# Altium PCB PCB1.PcbDoc
Units mil, origin at the board's own origin, x right, y up, seen from the top; angles counter-clockwise.
Board outline 2539.37 x 1515.75 mil, 2 copper layers (Top Layer, Bottom Layer); 111 components, 58 nets, 334 pads, 219 vias.
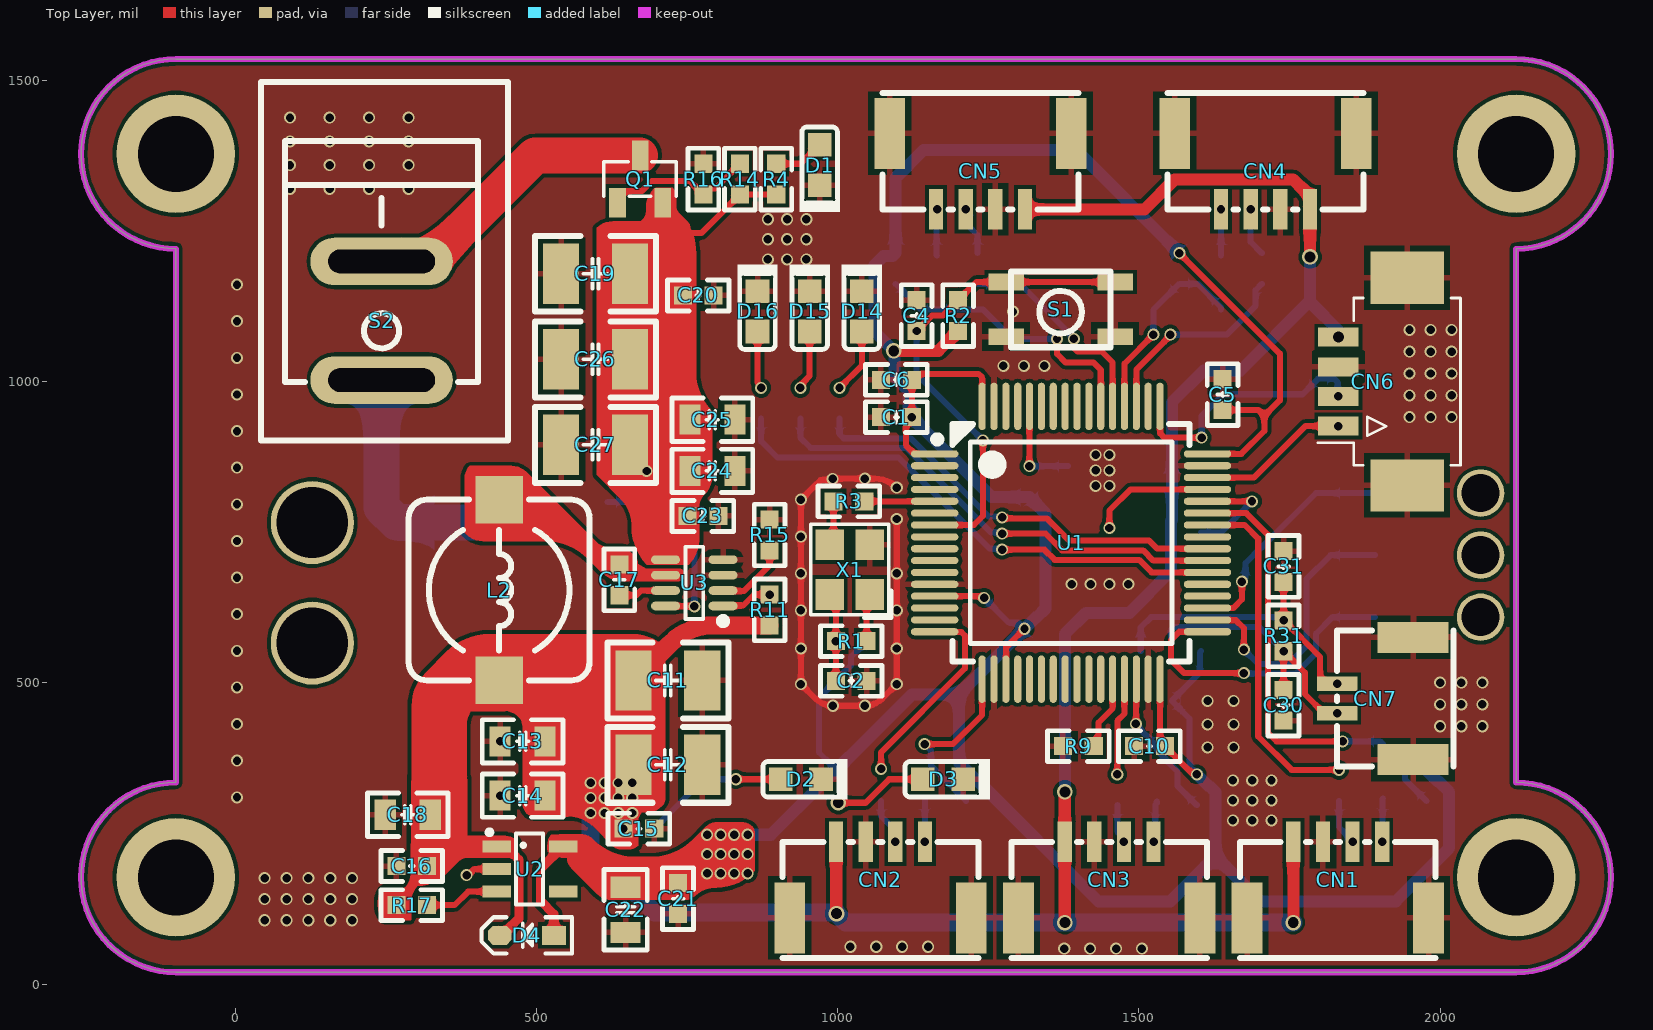
[diagram p0: Top Layer view]
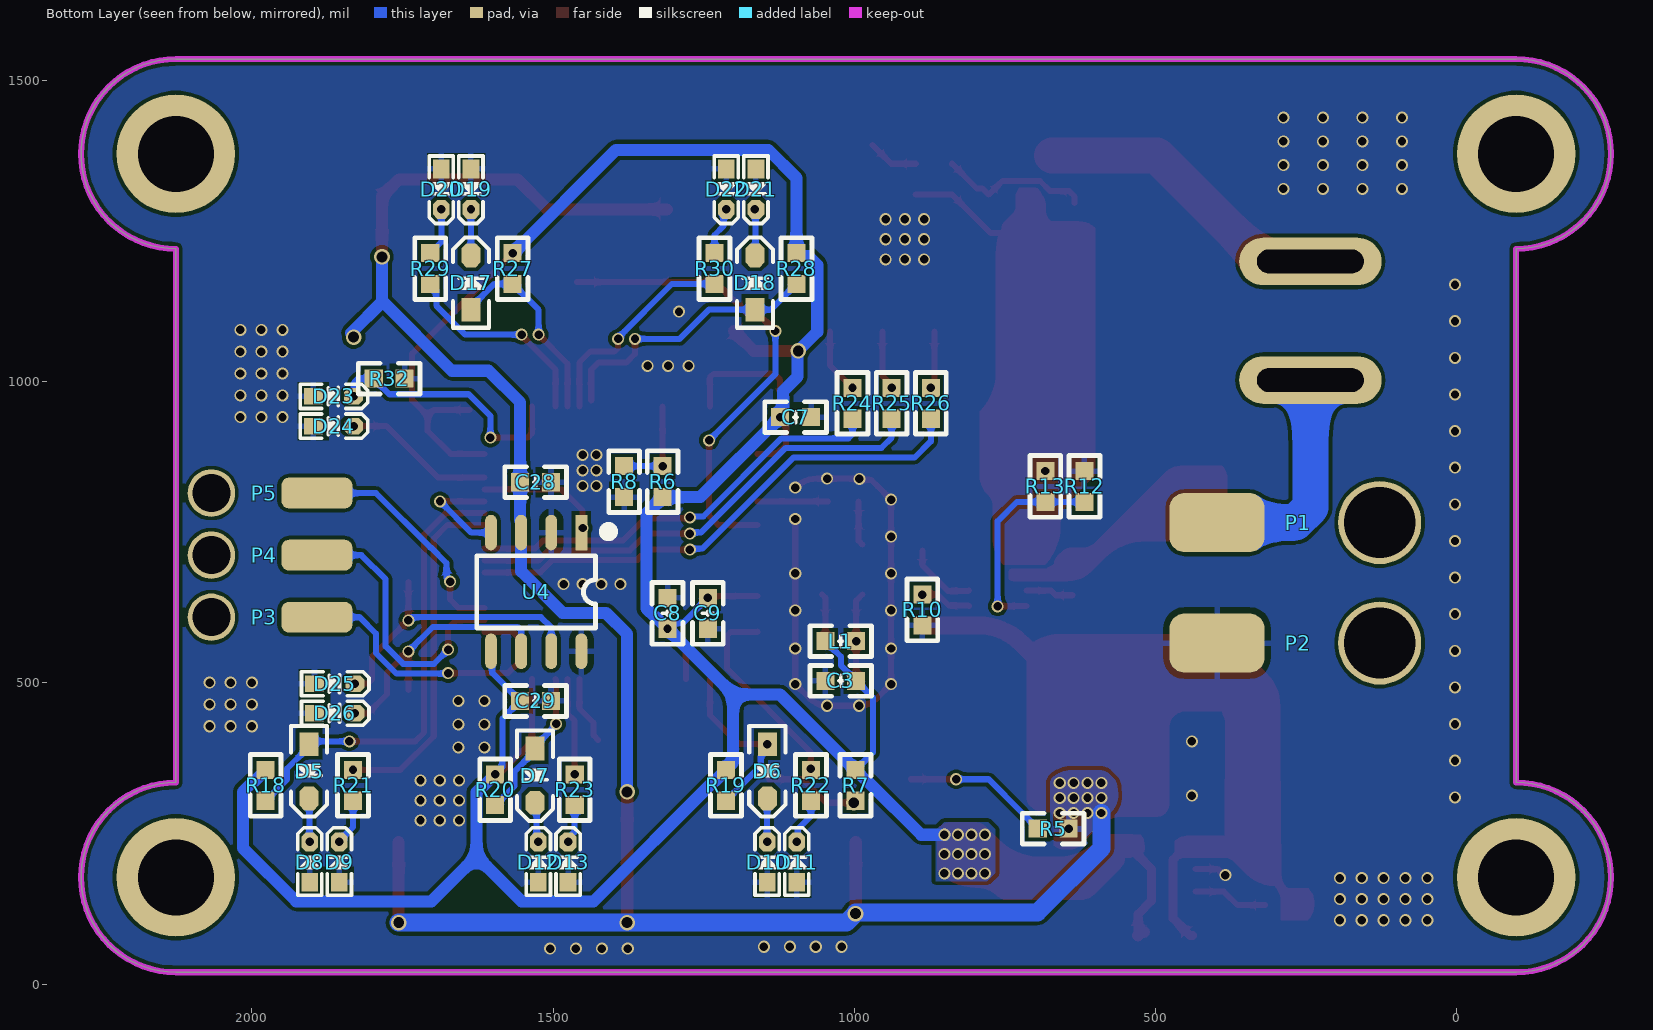
[diagram p1: Bottom Layer view, seen from below]
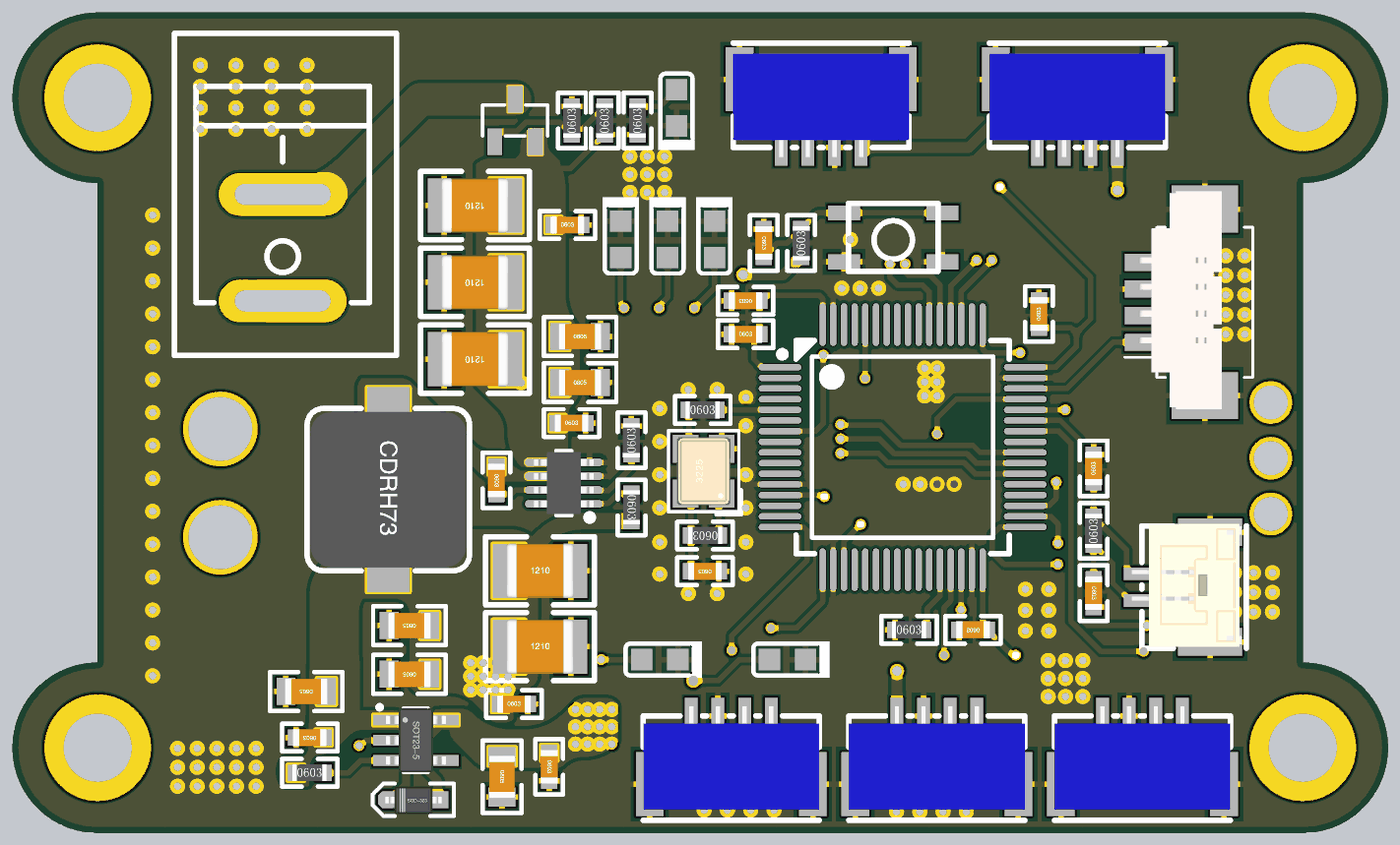
[diagram p2: 3D render of the assembled board from above, using the file's embedded part models]
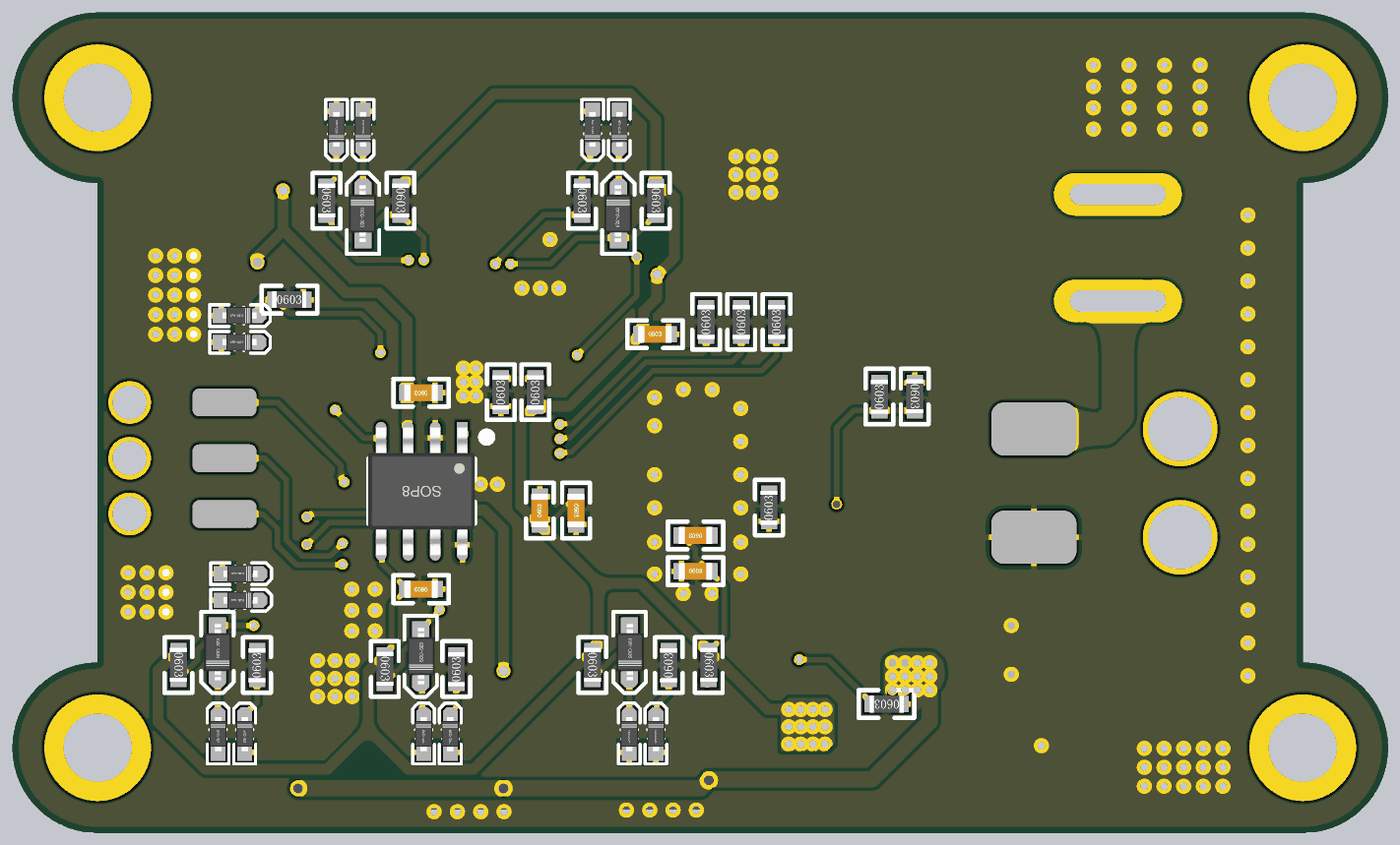
[diagram p3: 3D render of the assembled board from below, using the file's embedded part models]

## Layer stack, top to bottom
Top Solder: solder mask 0.4, Solder Resist, Dk 3.5
Top Layer: signal copper 1.4
Dielectric 1: dielectric 12.6, FR-4, Dk 4.8
Bottom Layer: signal copper 1.4
Bottom Solder: solder mask 0.4, Solder Resist, Dk 3.5

## Board outline
-98.43,334.65 -98.43,1220.47 cw(c-98.43,1377.95) -98.43,1535.43 2125.98,1535.43 cw(c2125.98,1377.95) 2125.98,1220.47 2125.98,334.65 cw(c2125.98,177.17) 2125.98,19.69 -98.43,19.68 cw(c-98.43,177.17)

## Design rules (kind name [scope] priority, off if disabled: settings)
Clearance [All] p1: gap=6 ignorepadtopadclearanceinfootprint=FALSE
PolygonConnect [All] p1: thpad.connectstyle=Relief thpad.reliefconductorwidth=10 thpad.reliefentries=4 thpad.polygonreliefangle="90 Angle" thpad.airgapwidth=10 smdpad.connectstyle=Relief smdpad.reliefconductorwidth=10 smdpad.reliefentries=4 smdpad.polygonreliefangle="90 Angle" smdpad.airgapwidth=10 via.connectstyle=Direct via.reliefconductorwidth=10 via.reliefentries=4 via.polygonreliefangle="90 Angle" via.airgapwidth=10
RoutingVias [All] p1: holewidth=14 width=50 viastyle="Through Hole" minholewidth=10 minwidth=10 maxholewidth=28 maxwidth=20
SolderMaskExpansion [All] p1: expansion=4 istentingtop=FALSE
Width [All] p1: maxlimit=60 minlimit=6 preferedwidth=10
30 further rules are at their usual default settings.

## Classes and differential pairs
component class Sheet1: C1 C2 C3 C4 C5 C6 C7 C8 C9 C10 C11 C12 C13 C14 C15 C16 C17 C18 C19 C20 C21 C22 C23 C24 C25 C26 C27 C28 C29 C30 C31 CN1 CN2 CN3 CN4 CN5 CN6 CN7 D1 D2 D3 D4 D5 D6 D7 D8 D9 D10 D11 D12 D13 D14 D15 D16 D17 D18 D19 D20 D21 D22 D23 D24 D25 D26 L1 L2 P1 P2 P3 P4 P5 Q1 R1 R2 R3 R4 R5 R6 R7 R8 R9 R10 R11 R12 R13 R15 R18 R21 R25 R26 R28 R31 R32 S1 S2 U1 U2 U3 U4 X1

## Components (designator, comment, footprint, x,y, rotation, side; value= is the part's Value field where it differs from the comment)
C1 "4.7uF" "C 0603_L" 1097.41,941 r0 top
C2 "100nF" "C 0603_L" 1022.46,503.34 r180 top
C3 "1uF" "C 0603_L" 1022.46,503.34 r180 bottom
C4 "100nF" "C 0603_L" 1131,1109.59 r270 top
C5 "4.7uF" "C 0603_L" 1639,978.59 r90 top
C6 "100nF" "C 0603_L" 1097.41,1003 r180 top
C7 "100nF" "C 0603_L" 1097.41,941 r180 bottom
C8 "100nF" "C 0603_L" 1310,615.41 r90 bottom
C9 "100nF" "C 0603_L" 1243,615.41 r270 bottom
C10 "100nF" "C 0603_L" 1517.41,395 r180 top
C11 "47uF/50V/1210" "C 1210_L" 718,504 r0 top
C12 "47uF/50V/1210" "C 1210_L" 718,364 r0 top
C13 "4.7uF/50V/0805" "C 0805_L" 477,402.84 r180 top
C14 "1uF/50V/0805" "C 0805_L" 477,312.84 r180 top
C15 "100nF/50V/0603" "C 0603_L" 670,258 r0 top
C16 "100nF/50V/0603" "C 0603_L" 293,196 r180 top
C17 "10nF/50V/0603" "C 0603_L" 637.6,671 r270 top
C18 "10uF/16V/0805" "C 0805_L" 286.4,281 r180 top
C19 "47uF/50V/1210" "C 1210_L" 598,1179 r180 top
C20 "100nF/50V/1210" "C 0603_L" 768.59,1143 r0 top
C21 "100nF/50V/0603" "C 0603_L" 735,142 r270 top
C22 "10uF/16V/0805" "C 0805_L" 648,123.4 r270 top
C23 "100nF/50V/0603" "C 0603_L" 776.26,777 r0 top
C24 "1uF/50V/0805" "C 0805_L" 792,851.84 r0 top
C25 "4.7uF/50V/0805" "C 0805_L" 792,936.84 r0 top
C26 "47uF/50V/1210" "C 1210_L" 598,1037 r180 top
C27 "47uF/50V/1210" "C 1210_L" 598,895 r180 top
C28 "0.1uF/0603" "C 0603_L" 1529,833 r0 bottom
C29 "0.1uF/0603" "C 0603_L" 1529,470 r0 bottom
C30 "47pF/0603" "C 0603_L" 1740.01,462.79 r270 top
C31 "47pF/0603" "C 0603_L" 1740,693.2 r90 top
CN1 "GH1.25" "GH1.25 4P-WT" 1830,173 r0 top
CN2 "GH1.25" "GH1.25 4P-WT" 1071,173 r0 top
CN3 "GH1.25" "GH1.25 4P-WT" 1450.5,173 r0 top
CN4 "GH1.25" "GH1.25 4P-WT" 1710,1349 r180 top
CN5 "GH1.25" "GH1.25 4P-WT" 1237,1349 r180 top
CN6 "MX1.25_4p" MX1.25_4PIN 1888,1000 r270 top
CN7 "GH1.25-2P" GH1.25-2P-LT 1892,474 r90 top
D1 "LED" LED_0603 970,1359.47 r90 top
D2 "LED" LED_0603 939,340 r180 top
D3 "LED" LED_0603 1174.8,340 r180 top
D4 "SD103AWS" SOD-323 484,81 r180 top
D5 "SD103AWS" SOD-323 1905,353.22 r270 bottom
D6 "SD103AWS" SOD-323 1144.41,353.22 r270 bottom
D7 "SD103AWS" SOD-323 1530,345.91 r270 bottom
D8 "ESD5Z5VL" SOD-523 1903.8,202.53 r90 bottom
D9 "ESD5Z5VL" SOD-523 1854.6,202.53 r90 bottom
D10 "ESD5Z5VL" SOD-523 1144.8,202.53 r90 bottom
D11 "ESD5Z5VL" SOD-523 1095.59,202.53 r90 bottom
D12 "ESD5Z5VL" SOD-523 1524.3,202.53 r90 bottom
D13 "ESD5Z5VL" SOD-523 1475.1,202.53 r90 bottom
D14 "LED" LED_0603 1040,1116.46 r270 top
D15 "LED" LED_0603 953.5,1116.46 r270 top
D16 "LED" LED_0603 867,1116.46 r270 top
D17 "SD103AWS" SOD-323 1636.2,1164.38 r90 bottom
D18 "SD103AWS" SOD-323 1164.91,1164.38 r90 bottom
D19 "ESD5Z5VL" SOD-523 1636.2,1319.47 r270 bottom
D20 "ESD5Z5VL" SOD-523 1685.4,1319.47 r270 bottom
D21 "ESD5Z5VL" SOD-523 1163.2,1319.47 r270 bottom
D22 "ESD5Z5VL" SOD-523 1212.41,1319.47 r270 bottom
D23 "ESD5Z5VL" SOD-523 1864.38,975.39 r180 bottom
D24 "ESD5Z5VL" SOD-523 1864.38,926.18 r180 bottom
D25 "ESD5Z5VL" SOD-523 1862.47,498.6 r180 bottom
D26 "ESD5Z5VL" SOD-523 1862.47,449.4 r180 bottom
L1 "磁珠470Ω" "C 0603_L" 1022.47,569.34 r0 bottom
L2 "33uF/1.5A" IND-SMD_L7.3-W7.3 438,654 r270 top
P1 "PAD_VCC" PAD_VCC 128,766 r90 bottom
P2 "PAD_VCC" PAD_VCC 128,566 r90 bottom
P3 "PAD_Signal" pad_signal 2067,609 r270 bottom
P4 "PAD_Signal" pad_signal 2067,712 r270 bottom
P5 "PAD_Signal" pad_signal 2067,815 r270 bottom
Q1 "YJL3401A" SOT-23-3_L2.9-W1.3-P1.90-LS2.4-BR 672,1336 r270 top
R1 "10K/0603" "R 0603_S" 1022.46,569.34 r180 top
R2 "1K" "R 0603_S" 1200,1109.59 r90 top
R3 "10Ω/0603" "R 0603_S" 1018.47,801.34 r0 top
R4 "40K/0603" "R 0603_S" 898,1336 r90 top
R5 "10K/0603" "R 0603_S" 670,257.99 r0 bottom
R6 "10K/0603" "R 0603_S" 1318,834 r90 bottom
R7 "10K/0603" "R 0603_S" 998,329.89 r270 bottom
R8 "10K/0603" "R 0603_S" 1382,834 r90 bottom
R9 "10K/0603" "R 0603_S" 1399.41,395 r0 top
R10 "30k/0603" "R 0603_S" 887,621.01 r90 bottom
R11 "220k/0603" "R 0603_S" 887,621 r270 top
R12 "30k/0603" "R 0603_S" 618,825.99 r270 bottom
R13 "100k/0603" "R 0603_S" 683,826 r90 bottom
R14 "40k/0603" "R 0603_S" 837.5,1336 r90 top
R15 "47k/0603" "R 0603_S" 886.99,745.41 r90 top
R16 "10k/0603" "R 0603_S" 777,1336 r90 top
R17 "4.7k/0603" "R 0603_S" 293.01,131 r0 top
R18 "10K/0603" "R 0603_S" 1977,329.89 r270 bottom
R19 "10K/0603" "R 0603_S" 1213,329.89 r270 bottom
R20 "10K/0603" "R 0603_S" 1596,322.59 r270 bottom
R21 "100Ω/0603" "R 0603_S" 1832,329.9 r90 bottom
R22 "100Ω/0603" "R 0603_S" 1072,329.9 r90 bottom
R23 "100Ω/0603" "R 0603_S" 1464,322.59 r90 bottom
R24 "10K/0603" "R 0603_S" 1003,964 r90 bottom
R25 "10K/0603" "R 0603_S" 938,964 r90 bottom
R26 "10K/0603" "R 0603_S" 873,964 r90 bottom
R27 "10K/0603" "R 0603_S" 1567,1187.69 r270 bottom
R28 "10K/0603" "R 0603_S" 1096,1187.69 r270 bottom
R29 "100Ω/0603" "R 0603_S" 1703.79,1187.69 r270 bottom
R30 "100Ω/0603" "R 0603_S" 1232,1187.69 r270 bottom
R31 "120Ω/0603" "R 0603_S" 1740,578 r90 top
R32 "10K/0603" "R 0603_S" 1772,1005 r180 bottom
S1 "C918859" KEY-4.2*3.25 1370,1120 r180 top
S2 "KCD1-101" SW-TH_MR5-111-C5N-BB 243,1101 r90 top
U1 "STM32F103RCT6" LQFP-64_L10.0-W10.0-P0.50-LS12.0-BL 1387.37,732.47 r270 top
U2 "LP5907QMFX-3.3Q1" SOT23-5N 489,191 r270 top
U3 "SY8303AIC" TSOT-23-8_L2.9-W1.6-P0.65-LS2.8-BR 762,666 r0 top
U4 "TJA1051T/3/1J" SOP8_L 1528,651 r270 bottom
X1 "YSO680PR_12M_3.3V" "OSC 3225-4P" 1020,688 r90 top

## Footprints (in the part's own frame and the unit in brackets; to place one, negate y for a bottom-side part, rotate by r counter-clockwise, add the part's x,y. Pads: shape width x height; smd on the part's side, far side on the other; paste and mask are expansions set on the pad)
"C 0603_L" [mil] "无极性贴片电容"
  rect 30x30 smd: 1(-25.59,0) 2(25.59,0)
  silkscreen extent -51,-26 51,26, body extent -31,-16 31,16, height 32
"C 0805_L" [mil] "无极性贴片电容"
  rect 35x50 smd: 1(-37.4,0) 2(37.4,0)
  silkscreen extent -67,-36 67,36, body extent -39,-24 39,24, height 20
"C 1210_L" [mil] "无极性贴片电容"
  rect 60x100 smd: 1(-57.09,0) 2(57.09,0)
  silkscreen extent -100,-63 100,63, body extent -63,-51 63,51, height 60
"GH1.25 4P-WT" [mil]
  rect 23.6x67 smd: 1(73.8,62.99) 2(24.6,62.99) 3(-24.6,62.99) 4(-73.81,62.99)
  rect 51.18x118.11 smd: 5(150.6,-62.99) 6(-150.6,-62.99)
  silkscreen extent -162,-130 162,63, body extent -162,-110 162,81, height 172
GH1.25-2P-LT [mil]
  rect 23.6x67 smd: 1(24.6,62.99) 2(-24.6,62.99)
  rect 51.18x118.11 smd: 3(101.38,-62.99) 4(-101.38,-62.99)
  silkscreen extent -113,-130 113,63, body extent -110,-121 116,81, height 162
IND-SMD_L7.3-W7.3 [mm] "7.3*7.3*3.4mm（长宽高）"
  rect 2x2 smd: 1(-3.81,0) 2(3.81,0)
  silkscreen extent -3.81,-3.81 3.81,3.81, body extent -3.65,-3.65 3.65,3.65, height 3.65
KEY-4.2*3.25 [mm]
  rect 1.5x0.7 smd: 1(2.299,-1.15) 2(-2.299,-1.15) 3(2.299,1.15) 4(-2.299,1.15)
  silkscreen extent -2.1,-1.6 2.1,1.6
LED_0603 [mm]
  rect 1x1 smd paste+0 mask+0: 1(0.85,0) 2(-0.85,0)
  silkscreen extent -1.97,-0.85 1.6,0.85, body extent -0.92,-0.53 1.09,0.53, height 0.46
LQFP-64_L10.0-W10.0-P0.50-LS12.0-BL [mm]
  oval 0.3x2 smd paste+0 mask+0.051: 1(-3.75,-5.75) 2(-3.25,-5.75) 3(-2.75,-5.75) 4(-2.25,-5.75) 5(-1.75,-5.75) 6(-1.25,-5.75) 7(-0.75,-5.75) 8(-0.25,-5.75) 9(0.25,-5.75) 10(0.75,-5.75) 11(1.25,-5.75) 12(1.75,-5.75) 13(2.25,-5.75) 14(2.75,-5.75) 15(3.25,-5.75) 16(3.75,-5.75) 33(3.75,5.75) 34(3.25,5.75) 35(2.75,5.75) 36(2.25,5.75) 37(1.75,5.75) 38(1.25,5.75) 39(0.75,5.75) 40(0.25,5.75) 41(-0.25,5.75) 42(-0.75,5.75) 43(-1.25,5.75) 44(-1.75,5.75) 45(-2.25,5.75) 46(-2.75,5.75) 47(-3.25,5.75) 48(-3.75,5.75)
  oval 2x0.3 smd paste+0 mask+0.051: 17(5.75,-3.75) 18(5.75,-3.25) 19(5.75,-2.75) 20(5.75,-2.25) 21(5.75,-1.75) 22(5.75,-1.25) 23(5.75,-0.75) 24(5.75,-0.25) 25(5.75,0.25) 26(5.75,0.75) 27(5.75,1.25) 28(5.75,1.75) 29(5.75,2.25) 30(5.75,2.75) 31(5.75,3.25) 32(5.75,3.75) 49(-5.75,3.75) 50(-5.75,3.25) 51(-5.75,2.75) 52(-5.75,2.25) 53(-5.75,1.75) 54(-5.75,1.25) 55(-5.75,0.75) 56(-5.75,0.25) 57(-5.75,-0.25) 58(-5.75,-0.75) 59(-5.75,-1.25) 60(-5.75,-1.75) 61(-5.75,-2.25) 62(-5.75,-2.75) 63(-5.75,-3.25) 64(-5.75,-3.75)
  silkscreen extent -5,-5.79 5,5
MX1.25_4PIN [mm]
  rect 0.8x1.7 smd: 1(1.875,-1.45) 2(0.625,-1.45) 3(-0.625,-1.45) 4(-1.875,-1.45)
  rect 2.2x3.1 smd: 5(-4.375,1.45) 6(4.375,1.45)
  silkscreen extent -3.52,-2.3 3.53,3.7, body extent -5.21,-1.65 5.01,2.25, height 4.75
"OSC 3225-4P" [mm] "3.2*2.5*0.7mm(长宽高)"
  rect 1.3x1.2 smd: 1(-1.05,-0.85) 2(1.05,-0.85) 3(1.05,0.85) 4(-1.05,0.85)
  silkscreen extent -2.03,-1.75 1.91,1.65, body extent -1.6,-1.25 1.6,1.25, height 0.7
pad_signal [mm]
  rrect50% 1.3x3 smd: 1(0,4.445)
  round 2 hole 1.6: 2(0,0)
PAD_VCC [mm]
  rrect50% 2.5x4 smd: 1(0,6.858)
  round 3.5 hole 3: 2(0,0)
"R 0603_S" [mil] "贴片电阻"
  rect 30x30 smd: 1(-25.59,0) 2(25.59,0)
  silkscreen extent -51,-26 51,26, body extent -32,-16 31,16, height 18
SOD-323 [mm] "1.8x1.3X0.9mm（长宽高，不包括引脚）"
  rect 1x0.8 smd: 1(-1.143,0)
  oct 1x0.8 smd: 2(1.143,0)
  silkscreen extent -1.91,-0.76 1.91,0.76, body extent -1.34,-0.63 1.31,0.67, height 1
SOD-523 [mm] "1.2x0.8X0.6mm（长宽高，不包括引脚）"
  rect 0.8x0.7 smd: 1(-0.85,0)
  oct 0.8x0.7 smd: 2(0.85,0)
  silkscreen extent -1.4,-0.51 1.45,0.51, body extent -0.8,-0.4 0.8,0.4, height 0.65
SOP8_L [mm] "5*6*1.8mm（长宽高）"
  rect 1.5x0.5 smd: 1(-2.5,1.905)
  oval 1.5x0.5 smd: 2(-2.5,0.635) 3(-2.5,-0.635) 4(-2.5,-1.905) 5(2.5,-1.905) 6(2.5,-0.635) 7(2.5,0.635) 8(2.5,1.905)
  silkscreen extent -2.69,-2.5 1.52,3.2, body extent -3,-2.5 3,2.5, height 1.9
SOT23-5N [mm] "3x1.6x1.1mm(长宽高)"
  rect 0.5x1.2 smd: 1(-0.95,-1.4) 2(0,-1.4) 3(0.95,-1.4) 4(0.95,1.4) 5(-0.95,1.4)
  silkscreen extent -1.63,-1.78 1.5,0.56, body extent -1.5,-1.4 1.5,1.4, height 1.15
SOT-23-3_L2.9-W1.3-P1.90-LS2.4-BR [mm]
  rect 1.25x0.7 smd mask+0.051: 1(1,-0.95) 2(1,0.95) 3(-1,0)
  silkscreen extent -0.73,-1.53 0.73,1.53
SW-TH_MR5-111-C5N-BB [mm]
  oval 2x6 hole 1 slot 4.5 at 90 deg paste+0 mask+0.051: 1(-2.5,0) 2(2.5,0)
  silkscreen extent -5.06,-5.33 10.06,5.08
TSOT-23-8_L2.9-W1.6-P0.65-LS2.8-BR [mil]
  oval 48.1x14.3 smd mask+2: 1(47.7,-38.4) 2(47.7,-12.8) 3(47.7,12.8) 4(47.7,38.4) 5(-47.7,38.4) 6(-47.7,12.8) 7(-47.7,-12.8) 8(-47.7,-38.4)
  silkscreen extent -15,-69 54,60, body extent -55,-57 55,57, height 39

## Part data
C1 C2 C3 C4 C5 C6 C7 C8 C9 C10 C11 C12 C13 C14 C15 C17 C18 C19 C20 C22 C23 C24 C25 C26 C27 C28 C29 C30 C31: library part CAP, "陶瓷电容"
C16 C21: library part CAP, "Capacitor"
CN1 CN2 CN3 CN4 CN5: library part "GH1.25 4p", "连接端子", BOM_Manufacturer="Changjiang Connectors", BOM_Manufacturer Part=A1257WR-S-4P, BOM_Supplier=LCSC, BOM_Supplier Part=C225127, Contributor=LCSC, spicePre=C, spiceSymbolName=A1257WR-S-4P
CN6: "连接端子", BOM_Manufacturer="Changjiang Connectors", BOM_Manufacturer Part=A1257WR-S-4P, BOM_Supplier=LCSC, BOM_Supplier Part=C225127, Contributor=LCSC, spicePre=C, spiceSymbolName=A1257WR-S-4P
CN7: "连接端子", BOM_Manufacturer="Changjiang Connectors", BOM_Manufacturer Part=A1257WR-S-2P, BOM_Supplier=LCSC, BOM_Supplier Part=C225125, Contributor=LCSC, spicePre=C, spiceSymbolName=A1257WR-S-2P
D1 D2 D3 D14 D15 D16: "发光二极管"
D4 D5 D6 D7 D17 D18: "二极管"
D8 D9 D10 D11 D12 D13 D19 D20 D21 D22 D23 D24 D25 D26: "ESD 单向 5V", BOM_JLCPCB Part Class="Extended Part", BOM_Manufacturer=MDD, BOM_Manufacturer Part=SMF6.5A, BOM_Supplier=LCSC, BOM_Supplier Part=C123792, Contributor=LCSC, spicePre=D, spiceSymbolName=SMF6.5A
L1: BOM_Manufacturer=Sunlord, BOM_Manufacturer Part=UPZ1608U471-1R5TF, BOM_Supplier=LCSC, BOM_Supplier Part=C74335, nameAlias=Value, spicePre=L, spiceSymbolName=UPZ1608U471-1R5TF
L2: library part L-SMD, "贴片功率电感", BOM名称=功率电感
Q1: Continuous Drain Current (Id)=4.4A, Drain Source On Resistance (RDS(on)@Vgs,Id)=55mΩ@10V,4.4A, Drain Source Voltage (Vdss)=30V, Gate Threshold Voltage (Vgs(th)@Id)=1.4V@250μA, JLCPCB Part Class="Extended Part", LCSC Part Name="P沟道 30V 4.4A", Manufacturer=YANGJIE(扬杰), Power Dissipation (Pd)=1.2W, Add into BOM=yes, Convert to PCB=yes, Datasheet=https://atta.szlcsc.com/upload/public/pdf/source/20190516/C393520_7481F6972A00CA4C56A9B9A98BC8DB32.pdf, Device=YJL3401A, Manufacturer Part=YJL3401A, Name=YJL3401A, Supplier=LCSC, Supplier Footprint=SOT-23, Supplier Part=C393520, Symbol=YJL3401A, Type=P沟道
R1 R2 R3 R4 R5 R6 R7 R8 R9 R10 R11 R12 R13 R14 R15 R16 R17 R18 R19 R20 R21 R22 R23 R24 R25 R26 R27 R28 R29 R30 R31 R32: library part RES, "贴片电阻"
S1: library part 按键, "DJI御用小按键"
S2: "单刀单掷 直插立式", BOM名称=1路单刀船型开关
U1: JLCPCB Part Class="Extended Part", LCSC Part Name="ARM Cortex-M3 72MHz", Low-Voltage Detect=-, Manufacturer=ST(意法半导体), Operating Temperature Range=-40℃~+85℃, Operating Voltage Range=2V~3.6V, ADC (Bit)=12bit, Add into BOM=yes, CCP Capture/Compare=-, communication protocol=-, Convert to PCB=yes, CPU Core="ARM Cortex-M3", CPU Maximum Speed=72MHz, DAC (Bit)=12bit, Datasheet=https://atta.szlcsc.com/upload/public/pdf/source/20161130/1480498797345.pdf, Device=STM32F103RCT6, Direct Memory Access=-, EEPROM=256KB, GPIO Ports Number=51, Infrared Data Association=-, Internal Comparator=-, Internal Oscillator=有, Manufacturer Part=STM32F103RCT6, Name=STM32F103RCT6, Peripheral/Function=DMA；看门狗；片载温度传感器；PWM, Program Memory Type=FLASH, Program Storage Size=256KB, PWM (Bit)=-, RAM Size=48KB, Real-Time Clock=-, Secure Digital Input and Output=-, Supplier=LCSC, Supplier Footprint=LQFP-64(10x10), Supplier Part=C8323, Symbol=STM32F103RCT6, Universal Serial Bus=-, Watchdog=-
U2: BOM_JLCPCB SMD=Yes, BOM_Manufacturer=TI, BOM_Manufacturer Part=LP5907QMFX-3.3Q1, BOM_Supplier=LCSC, BOM_Supplier Part=C130005, Contributor=LCSC, SMT Type=Extend, spicePre=U, spiceSymbolName=LP5907QMFX-3.3Q1
U3: "DCDC ADJ 3A", Input Voltage=-, JLCPCB Part Class="Extended Part", LCSC Part Name=降压型, Manufacturer=矽力杰silergy, Add into BOM=yes, Convert to PCB=yes, Datasheet=https://atta.szlcsc.com/upload/public/pdf/source/20170308/1488958431714.pdf, Device=SY8303AIC, Function=降压型, Manufacturer Part=SY8303AIC, Name=SY8303AIC, Number of Outputs=-, Output Current (Max)=-, Supplier=LCSC, Supplier Footprint=TSOT-23-8, Supplier Part=C97054, Switching Frequency=-, Symbol=SY8303AIC, Synchronous Rectification=-, Topology=-
U4: "CAN芯片", BOM_JLCPCB Part Class="Extended Part", BOM_Manufacturer=NXP, BOM_Manufacturer Part=TJA1051T/3/1J, BOM_Supplier=LCSC, BOM_Supplier Part=C38695, spicePre=U, spiceSymbolName=TJA1051T/3/1J
X1: "有源晶振12M", BOM_Manufacturer="Yangxing Tech", BOM_Manufacturer Part=OP322512MEDA4SI-u, BOM_Supplier=LCSC, BOM_Supplier Part=C382483, Contributor=LCSC, nameAlias=Frequency, spicePre=X, spiceSymbolName=OP322512MEDA4SI-U

## Free pads (board coordinates)
  round 196.85 hole 125.98: 8(-98.43,177.17) 8(-98.43,1377.95) 8(2125.98,177.17) 8(2125.98,1377.95)

## Via types
v1: diameter 20, hole 14, Top Layer to Bottom Layer, 211 vias
v2: diameter 26, hole 18, Top Layer to Bottom Layer, 8 vias

## Nets (pads, with @x,y where several pads share a name; then routed paths per layer and width w, separated by ;. In a path a pad name is that pad's centre, name@x,y a point inside that pad or via, vN(x,y) a via of type N, cw(c..) or ccw(c..) an arc to the next point about the centre after c; other vN are vias at no path point)
3V3: C1.2 C3.2 C5.1 C6.1 C7.1 C8.1 C9.1 C10.1 C21.1 C22.1 C29.2 D4.1 L1.2 R2.1 R6.1 R7.1 R18.1 R19.1 R20.1 R27.1 R28.1 U1.1 U1.13 U1.19 U1.32 U1.48 U1.64 U2.5 U4.5 | length 5686.1
  Top Layer w10: U1.13 1240.11,643.89 v1(1243,641) ; U1.1 1127.41,880.11 1113,894.53 1113,931 v1(1123,941) C6.1 1133,1013 1233.73,1013 1239.73,1007 U1.64 ; U1.19 1279.45,506.45 1279.45,559.27 v1(1310,589.82) ; U1.32 1535.01,402.99 C10.1 1587.9,350.1 1594.09,350.1 v1(1596,348.19) ; v1(1567,1213.29) 1734,1046.29 1734,969 1708,943 ; U1.48 1670.11,880.11 1708,918 1708,943 ; C5.1 1698,953 1708,943
  Top Layer w15: U2.5@528,226.06 530.34,228.4 U2.5 507,191.28 507,138.16 529,116.16 D4.1
  Top Layer w20: D4.1@519.31,86.75 523.25,86.75 D4.1 ; v2(1093,1051) 1167,1051 R2.1
  Bottom Layer w10: R7.1@993,360.49 969,384.49 969,475.46 C3.2 1022.47,528.93 1022.47,543.75 L1.2 ; v1(1243,641) 1284.18,599.82 1300,599.82 v1(1310,589.82) ; v1(1596,348.19) 1586,358.18 1583.75,360.44 1583.75,440.84 C29.2 1601.15,516.56 1601.15,550.72 U4.5
  Bottom Layer w20: v1(850.5,247.88) 888.95,247.88 976.37,335.31 977.82,335.31 R7.1 1123.33,480.82 1201,480.82 ; v1(1567,1213.29) 1395.6,1384.69 1142.8,1384.69 1096,1337.89 R28.1 1091,1208.29 1076.01,1208.29 1061.5,1193.78 1061.5,1082.5 v2(1093,1051) 1094.15,1049.85 1094.15,1008.23 1118,984.38 1118,946 v1(1123,941) 1255.59,808.41 R6.1 1345,781.4 1345,623.37 1330.59,608.96 1329.14,608.96 v1(1310,589.82) 1201,480.82 ; v1(1596,348.19) 1615.15,329.05 1616.59,329.05 1627,318.63 1627,235 1627,212 ; R18.1 1996.15,336.34 1997.59,336.34 2014.8,319.14 2014.8,225.8 1926.31,137.31 1701.69,137.31 1627,212 ; 1201,480.82 1201,367.49 R19.1 1232.15,336.34 1233.59,336.34 1432.62,137.31 1552.31,137.31 1627,212
  other v1: 783.45,183.88 805.8,183.88 828.15,183.88 850.5,183.88 783.45,215.88 805.8,215.88 828.15,215.88 850.5,215.88 783.45,247.88 805.8,247.88 828.15,247.88
5V: C11.1 C12.1 C13.1 C14.1 C15.1 C16.1 C18.1 C28.2 CN1.4 CN2.4 CN3.4 CN4.4 CN5.4 CN6.4 D4.2 L2.2 R5.1 R11.2 R17.1 U2.1 U4.3 | length 4014.2
  Top Layer w15: U2.1 447.66,228.4 460.61,215.45 461.99,215.45 471,206.43 471,109.07 442.94,81 D4.2
  Top Layer w20: C14.1@511.64,306.16 ccw(c504.94,312.84) C14.1 ; CN2.4 997.6,235.59 997.6,117.4 v2(998,117) ; CN5.4 1509.56,1286.01 1559.06,1335.51 1756.01,1335.51 1783.81,1307.71 CN4.4 1783.9,1285.91 1783.9,1207.1 v2(1784,1207) ; v2(1377,102) 1376.85,102.15 1376.85,318.85 v2(1377,319) ; v2(1756.1,102) v2(1756.1,102) 1756.15,235.94 CN1.4
  Top Layer w30: C11.1 723.04,566.12 cw(c793.75,495.41) 793.75,595.41 R11.2
  Bottom Layer w20: v2(1377,319) 1377,581 1412,616 1484,616 1553,685 U4.3 1553,768.8 1554.59,770.38 C28.2 1554.59,965.59 1607,1018 1668,1018 1784,1134 ; v2(1784,1207) 1784,1134 ; v2@1835,1081 1784,1132 1784,1134
  Bottom Layer w30: v1(590,284) 590,225.41 696.41,119 v2@998,119 ; v2(998,117) 1013,102 v2(1377,102) v2(1756.1,102)
  other v1: 644.41,258 613,284 636,284 659,284 590,309 613,309 636,309 659,309 590,334 613,334 636,334 659,334
  other v2: 1830.91,1073.82
24V: C19.1 C20.1 C23.1 C24.1 C25.1 C26.1 C27.1 Q1.2 R4.1 R13.2 R14.1 U3.5 | length 196.3
  Top Layer w10: 728,1247 774.1,1247 R14.1 R4.1
  other v1: 683,851.59
24V_IN: P1.1 S2.1 | length 376.9
  Bottom Layer w60: S2.1 243,791.04 268.04,766 P1.1
BOOT0: R6.2 R8.2 U1.60 | length 163.4
  Top Layer w10: v1(1318,859.59) 1318.23,859.82 1318.23,958.6 U1.60
  Bottom Layer w10: v1(1318,859.59) R8.2
BOOT1: R9.2 U1.28 | length 114.1
  Top Layer w10: R9.2@1425,405 1432.86,412.86 1432.86,434 1456.27,457.41 U1.28
CAN_H: C31.1 CN7.1 D25.2 R31.2 U4.7 | length 504.4
  Top Layer w10: C31.1 v1(1740,603.59) 1800.51,543.08 1800.51,505.4 1807.31,498.6 v1(1829.01,498.6)
  Bottom Layer w10: U4.7 1503,592 1520.1,609.1 1734.49,609.1 v1(1740,603.59)
CAN_L: C30.1 CN7.2 D26.2 R31.1 U4.6 | length 457.6
  Top Layer w10: C30.1 v1(1740,552.41) 1743.01,549.4 1775.26,517.15 1775.26,481.45 1807.31,449.4 v1(1829.01,449.4)
  Bottom Layer w10: U4.6 1553,587.24 1558.86,593.1 1699.31,593.1 v1(1740,552.41)
CAN_RX: U1.44 U4.4 | length 180
  Top Layer w10: U1.44 v1(1687.63,801.37)
  Bottom Layer w10: U4.4 1635.69,749.43 v1(1687.63,801.37)
CAN_TX: U1.45 U4.1 | length 206.3
  Top Layer w10: v1(1451,757) 1451,786 1486.05,821.05 U1.45
GND: C1.1 C2.1 C3.1 C4.1 C5.2 C6.2 C7.2 C8.2 C9.2 C10.2 C11.2 C12.2 C13.2 C14.2 C15.2 C16.2 C18.2 C19.2 C20.2 C21.2 C22.2 C23.2 C24.2 C25.2 C26.2 C27.2 C28.1 C29.1 C30.2 C31.2 CN1.3 CN1.5 CN1.6 CN2.3 CN2.5 CN2.6 CN3.3 CN3.5 CN3.6 CN4.3 CN4.5 CN4.6 CN5.3 CN5.5 CN5.6 CN6.3 CN6.5 CN6.6 CN7.3 CN7.4 D1.2 D2.2 D3.2 D8.1 D9.1 D10.1 D11.1 D12.1 D13.1 D14.2 D15.2 D16.2 D19.1 D20.1 D21.1 D22.1 D23.1 D24.1 D25.1 D26.1 P2.1 R8.1 R9.1 R10.1 R12.1 R15.2 R16.2 R32.2 S1.3 S1.4 U1.12 U1.18 U1.31 U1.47 U1.63 U2.2 U3.3 U3.4 U4.2 U4.8 X1.2 | length 996.3
  Top Layer w10: v1(384,181) 387.25,181 397.25,191 U2.2 ; v1(991.65,838.65) 989.74,836.74 971.74,836.74 961.27,826.27 v1(939,804) v1(939,742.8) v1(939,681.6) v1(939,620.4) v1(939,557) v1(939,498) 962.98,474.02 ccw(c992,503.04) v1(992,462) v1(1045,462) ccw(c1045,503.04) 1074.02,474.02 v1(1098,498) v1(1098,557) v1(1098,620.4) v1(1098,681.6) v1(1098,772) ; v1@992,839 v1(1045,839) 1061.79,839 cw(c1061.79,787.79) v1(1098,824)
  other v1: 1376,59 1419,59 1462,59 1505,59 1021,62 1064,62 1107,62 1150,62 49,106 85.25,106 121.5,106 157.75,106 194,106 49,141 85.25,141 121.5,141 157.75,141 194,141 49,176 85.25,176 121.5,176 157.75,176 194,176 1656,271.75 1688,271.75 1720,271.75 1656,305 1688,305 1720,305 3,310 439.6,312.84 1656,338.25 1688,338.25 1720,338.25 3,370.79 1614,393 1657,393 439.6,402.84 2000,428 2035,428 2070,428 1614,431 1657,431 3,431.57 2000,464.25 2035,464.25 2070,464.25 1614,470 1657,470 3,492.36 2000,500.5 2035,500.5 2070,500.5 3,553.14 3,613.93 1388.33,664 1419.67,664 1451,664 1482.33,664 3,674.71 3,735.5 3,796.29 1428,827 1451,827 1428,852.75 1451,852.75 3,857.07 1428,878.5 1451,878.5 3,917.86 1949,941 1984,941 2019,941 1949,977.25 1984,977.25 2019,977.25 3,978.64 1949,1013.5 1984,1013.5 2019,1013.5 1275,1026 1309,1026 1343,1026 3,1039.43 1949,1049.75 1984,1049.75 2019,1049.75 1949,1086 1984,1086 2019,1086 3,1100.21 1291,1116 3,1161 884,1203 916,1203 948,1203 884,1236.25 916,1236.25 948,1236.25 884,1269.5 916,1269.5 948,1269.5 91,1320 156.67,1320 222.33,1320 288,1320 91,1359.33 156.67,1359.33 222.33,1359.33 288,1359.33 91,1398.67 156.67,1398.67 222.33,1398.67 288,1398.67 91,1438 156.67,1438 222.33,1438 288,1438
GPIO_PB12: P3.1 U1.33 | length 505.5
  Top Layer w10: U1.33 1567,584.83 1553,570.83 1553,538 1575,516 v1(1674,516)
  Bottom Layer w10: v1(1674,516) 1674.59,515.41 1759.82,515.41 1794,549.59 1794,582 1821,609 P3.1
GPIO_PB13: P4.1 U1.34 | length 469.6
  Top Layer w10: U1.34 1614.09,604.17 1660.83,604.17 1674,591 v1(1674,555)
  Bottom Layer w10: v1(1674,555) 1697.59,531.41 1748.7,531.41 1778,560.7 1778,672 1818,712 P4.1
GPIO_PB14: P5.1 U1.35 | length 389.3
  Top Layer w10: U1.35 1614.09,624.55 1657.14,624.55 1670.94,638.34 v1(1670.94,667.94) v1@1674,671
  Bottom Layer w10: v1@1674,671 1677,674 1677,699 1703,725 1703.86,725 1793.86,815 P5.1
LED_PC7: R26.1 U1.38 | length 868.3
  Top Layer w10: v1(1273,721) 1343,721 1360,704 1500.27,704 1521.01,683.26 U1.38
  Bottom Layer w10: R26.1 873,901 900,874 1022.15,874 1022.45,873.7 1101.3,873.7 1252.09,722.91 1271.09,722.91 v1(1273,721)
LED_PC8: R25.1 U1.39 | length 791.8
  Top Layer w10: v1(1273,747.77) 1344.9,747.77 1372.66,720 1506.9,720 1523.96,702.94 U1.39
  Bottom Layer w10: R25.1 938,906.86 954.85,890 1028.78,890 1029.07,889.7 1114.3,889.7 1254.32,749.68 1271.09,749.68 v1(1273,747.77)
LED_PC9: R24.1 U1.40 | length 716.7
  Top Layer w10: v1(1273,774.53) 1274.53,773 1347,773 1384,736 1517,736 1530.37,722.63 U1.40
  Bottom Layer w10: R24.1 1003,912.82 1009.81,906 1035.4,906 1035.7,905.7 1120.92,905.7 1250.35,776.28 1257.35,776.28 1257.57,776.06 1270.94,776.06 v1@1274,773
NetC2_2: C2.2 L1.1 R1.2 X1.4 | length 147.6
  Top Layer w10: X1.4 996.88,636.32 v1(996.88,569.34) C2.2
NetC17_1: C17.1 L2.1 U3.6
NetC17_2: C17.2 U3.7 | length 79.9
  Top Layer w10: C17.2 665.41,645.41 673.2,653.2 U3.7
NetCN1_1: CN1.1 D5.2 D8.2 | length 72.7
  Bottom Layer w10: v1(1903.8,235.99) 1904.4,236.59 1904.4,307.61 D5.2
NetCN1_2: CN1.2 D9.2 R21.1 | length 77.7
  Bottom Layer w10: R21.1 1831.99,260.56 1854.6,237.96 v1(1854.6,235.99)
NetCN2_1: CN2.1 D6.2 D10.2 | length 72.4
  Bottom Layer w10: D6.2 1144.6,308.02 1144.6,236.18 v1(1144.8,235.99)
NetCN2_2: CN2.2 D11.2 R22.1 | length 78.1
  Bottom Layer w10: R22.1 1072,278.72 1093.68,257.04 1093.68,237.9 v1(1095.59,235.99)
NetCN3_1: CN3.1 D7.2 D12.2 | length 68.8
  Bottom Layer w10: v1(1524.3,235.99) 1527.15,238.84 1527.15,298.06 D7.2 ; D7.2@1528.95,301.95 D7.2@1530,303
NetCN3_2: CN3.2 D13.2 R23.1 | length 65.6
  Bottom Layer w10: R23.1 1464,253.01 1475.1,241.92 v1(1475.1,235.99)
NetCN4_1: CN4.1 D17.2 D19.2 | length 76.6
  Bottom Layer w10: D17.2 v1(1636.2,1286.01)
NetCN4_2: CN4.2 D20.2 R29.1 | length 80.3
  Bottom Layer w10: v1(1685.4,1286.01) 1685.4,1231.68 R29.1
NetCN5_1: CN5.1 D18.2 D21.2 | length 77.3
  Bottom Layer w10: D18.2 1164.06,1210.23 1164.06,1285.16 v1(1164.91,1286.01)
NetCN5_2: CN5.2 D22.2 R30.1 | length 80.8
  Bottom Layer w10: v1(1212.41,1286.01) 1217.22,1281.19 1217.22,1258.07 1232,1243.29 R30.1
NetD1_1: D1.1 R4.2 | length 85
  Top Layer w10: R4.2 938.66,1361.59 D1.1
NetD2_1: D2.1 R5.2 | length 244.3
  Top Layer w10: v1(831,340) D2.1
  Bottom Layer w10: R5.2 721,283.41 721,284 777,340 v1(831,340)
NetD3_1: D3.1 R7.2 | length 156.5
  Top Layer w10: v2(1001,301) 1046.49,301 1085.49,340 D3.1
NetD14_1: D14.1 R24.2 | length 108.7
  Top Layer w10: v1(1003,989.59) 1040,1026.59 D14.1
NetD15_1: D15.1 R25.2 | length 99.8
  Top Layer w10: v1(938,989.59) 938,993.92 953.5,1009.42 D15.1
NetD16_1: D16.1 R26.2 | length 95.9
  Top Layer w10: D16.1 867,998.29 873,992.29 v1(873,989.59)
NetQ1_1: Q1.1 R14.2 R16.1 | length 254.9
  Top Layer w10: Q1.1 634.6,1307.46 643.38,1316.24 675.06,1316.24 691.83,1333 754.41,1333 R16.1 787,1320.41 796.32,1320.41 R14.2
NetQ1_3: Q1.3 S2.2 | length 501.9
  Top Layer w60: S2.2 321.74,1199.42 497.69,1375.37 Q1.3
NetR1_1: R1.1 X1.1 | length 79.6
  Top Layer w10: R1.1 1048.06,641.26 X1.1
NetR3_1: R3.1 X1.3 | length 74.6
  Top Layer w10: X1.3 992.88,735.68 R3.1
NetR10_2: R10.2 R11.1 U3.1 | length 85.2
  Top Layer w10: U3.1 810.52,628.42 843.05,628.42 861.22,646.59 v1(887,646.59)
NetR12_2: R12.2 R13.1 U3.8 | length 346.6
  Top Layer w10: U3.8 714.6,627.3 761.7,627.3 v1(762,627)
  Bottom Layer w10: R12.2 R13.1 730,800.41 762,768.41 v1(762,627)
NetR15_1: R15.1 U3.2 | length 120.1
  Top Layer w10: U3.2 810.52,652.38 844.38,652.38 887,695 R15.1
NetR17_2: R17.2 U2.3 | length 124.6
  Top Layer w10: R17.2 364,131 386.6,153.6 U2.3
NRST: C4.2 R2.2 S1.1 S1.2 U1.7 | length 802
  Top Layer w10: v1(1130.99,1084) 1156.58,1109.59 1174.41,1109.59 R2.2 1230.09,1165.27 S1.1 S1.2 ; U1.7 1226,762 1241,777 v1(1241,902.5)
  Bottom Layer w10: v1(1130.99,1084) 1130.99,1012.5 v1(1241,902.5)
OSC_12M: R3.2 U1.5 | length 117
  Top Layer w10: R3.2@1044.09,801.37 U1.5
SWCLK: CN6.2 D23.2 R32.1 U1.49 | length 430.9
  Top Layer w10: U1.49 1535.01,914 1542.01,907 v1(1604,907)
  Bottom Layer w10: v1(1604,907) 1604,943 1640,979 1771.59,979 R32.1 1824,1005 1829.86,999.14 1829.86,976.44 v1(1830.91,975.39)
SWDIO: CN6.1 D24.2 U1.46 | length 252.6
  Top Layer w10: U1.46 1690.74,840.74 1776.18,926.18 v1(1830.91,926.18)
UART4_RX: D17.1 R27.2 U1.52 | length 330.2
  Top Layer w10: U1.52 1475.95,1029.95 v1(1524,1078)
  Bottom Layer w10: v1(1524,1078) 1524,1119.1 R27.2 1597.41,1162.11 1636.2,1123.32 D17.1
UART4_TX: R29.2 U1.51 | length 348.2
  Top Layer w10: U1.51 1495.64,1019.94 1552,1076.3 v1(1552,1078) ; v1@1554.81,1075.19 1557,1077.37 v1@1557,1078
  Bottom Layer w10: v1(1552,1078) 1645.82,1078 1693.8,1125.98 1693.8,1152.11 R29.2
UART5_RX: D18.1 R28.2 U1.54 | length 465.3
  Top Layer w10: v1(1364,1071) 1364,1046 1378,1032 1424.14,1032 1436.58,1019.56 1436.58,969.04 U1.54@1436.23,968.69
  Bottom Layer w10: R28.2 1138.73,1119.38 D18.1 1241.54,1119.38 1289.92,1071 v1(1364,1071)
UART5_TX: R30.2 U1.53 | length 361.3
  Top Layer w10: v1(1392,1071) 1392,1055.81 1397.86,1049.95 1438.05,1049.95 1456.27,1031.73 1456.27,983.48 1455.92,983.13 1455.92,959.19 U1.53
  Bottom Layer w10: R30.2 1302.59,1162.11 1392,1072.7 v1(1392,1071)
USART1_RX: D5.1 R18.2 U1.43 | length 776.4
  Top Layer w10: U1.43 1678.27,781.68 1714,745.94 1714,417.65 1728.65,403 1832,403 v1(1838,403)
  Bottom Layer w10: v1@1835,400 1832,403 1900.22,403 D5.1 1905,394.28 1941.38,357.9 1941.38,339.93 R18.2
USART1_TX: R21.2 U1.42 | length 579
  Top Layer w10: U1.42 1675.32,762 1698,739.32 1698,411 1753.52,355.49 v1(1831.99,355.49)
USART2_RX: D6.1 R19.2 U1.17 | length 297.1
  Top Layer w10: v1(1144.41,398.22) 1191.22,398.22 1239.73,446.73 U1.17
  Bottom Layer w10: v1(1144.41,398.22) 1155.16,387.47 1155.16,362.15 R19.2
USART2_TX: R22.2 U1.16 | length 331.4
  Top Layer w10: v1(1072,357.33) 1072,384.76 1211,523.76 1211,578.63 1205.14,584.48 1161.35,584.48 U1.16
USART3_RX: D7.1 R20.2 U1.30 | length 245
  Top Layer w10: v1(1495,432) 1495.32,432.32 1495.32,505.78 U1.30
  Bottom Layer w10: v1(1495,432) 1495,429.85 1524.94,399.91 D7.1@1524.94,395 ; D7.1 1530,386.97 1563.88,353.1 1563.88,329.13 R20.2
USART3_TX: R23.2 U1.29 | length 162.9
  Top Layer w10: v1(1464,348.18) 1464,437 1475.95,448.95 U1.29
pads on no net: P1.2 P2.2 P3.2 P4.2 P5.2 U1.2 U1.3 U1.4 U1.6 U1.8 U1.9 U1.10 U1.11 U1.14 U1.15 U1.20 U1.21 U1.22 U1.23 U1.24 U1.25 U1.26 U1.27 U1.36 U1.37 U1.41 U1.50 U1.55 U1.56 U1.57 U1.58 U1.59 U1.61 U1.62 U2.4

## Polygon pours and split planes (outlines as drawn)
GND on Bottom Layer "GND_L02_P018" (solid, remove dead copper, pour order 18): -98.43,334.65 -98.43,1220.47 cw(c-98.43,1377.95) -98.43,1535.43 2125.98,1535.43 cw(c2125.98,1377.95) 2125.98,1220.47 2125.98,334.65 cw(c2125.98,177.17) 2125.98,19.69 -98.43,19.68 cw(c-98.43,177.17)
5V on Bottom Layer "5V_L02_P002" (solid, remove dead copper, pour order 2): 567,339 577.34,349.34 cw(c591,335.69) 591,355 640.62,355 cw(c640.62,310.62) 672,342 cw(c664.76,334.76) 675,334.76 675,245.49 cw(c652.08,245.49) 668.29,229.29 645.62,229.29 cw(c645.62,255.62) 627,237 cw(c627,249.07) 618.46,240.54 570,289 cw(c606.34,313.95) 563,322 563.6,330.4
3V3 on Bottom Layer "3V3_L02_P000" (solid, remove dead copper, pour order 0): 778,269 851,269 865,255 865,171 779,171 766,184 766,257
GND on Top Layer "GND_L01_P019" (solid, remove dead copper, pour order 19): -98.43,334.65 -98.43,1220.47 cw(c-98.43,1377.95) -98.43,1535.43 2125.98,1535.43 cw(c2125.98,1377.95) 2125.98,1220.47 2125.98,334.65 cw(c2125.98,177.17) 2125.98,19.69 -98.43,19.68 cw(c-98.43,177.17)

## Keep-outs
Keep-Out Layer:
  the board outline again, w10

## Other copper
Top Layer:
  region net 24V: 600,1255 cw(c626.56,1228.44) 626.56,1266 673,1266 677.05,1270.05 ccw(c665.1,1282) 682,1282 682,1288.62 cw(c726.38,1288.62) 695,1320 cw(c699.83,1315.17) 699.83,1322 726,1322 cw(c711.51,1307.51) 732,1307.51 732,1293 ccw(c753.73,1293) 738.36,1277.64 751.6,1264.4 cw(c742.2,1255) 755.49,1255
  region net 5V: 429.17,581 421.42,581 ccw(c421.42,481) 350.71,551.71 316,517 ccw(c371.53,461.47) 293,461.47 293,380 307.71,380 cw(c307.71,280) 378.42,350.71 385,344.13 cw(c387.41,346.54) 384,346.54 384,430 cw(c422.63,430) 395.31,457.31 401,463
  region net 5V: 293,390.68 302,397 353.76,397 cw(c353.76,386.76) 361,394 cw(c303.07,336.06) 385,336.06 385,246 448.69,246 cw(c448.69,218.69) 468,238 468,224.35 cw(c448.4,224.34) 462.26,210.49 cw(c461.09,211.65) 461.09,210 389,210 ccw(c389,181.04) 368.51,201.51 349.09,182.09 cw(c303,228.18) 303,163 ccw(c329.55,136.45) 292,136.44 292,107 cw(c289.59,109.41) 289.59,106 247,106 cw(c271.14,130.14) 237,130.14 237,137.27 cw(c267.73,137.27) 246,159 275.76,159 ccw(c275.76,169.24) 283,162 ccw(c263.69,181.31) 291,181.31
  region net 5V: 377,515.3 cw(c448.7,515.3) 398,566 cw(c434.21,529.79) 434.21,581 661,581 cw(c661,508.57) 712.21,559.79 714,558 714,309.49 cw(c693.51,309.49) 708,295 cw(c683.86,319.14) 683.86,285 675,285 ccw(c689.49,270.51) 669,270.51 669,230 cw(c654.51,244.49) 654.51,224 639,224 cw(c639,240.9) 627.05,228.95 596,260 ccw(c552.54,216.54) 552.54,278 496.07,278 cw(c496.07,295.07) 484,283 cw(c500.9,299.9) 477,299.9 477,427.1 ccw(c453.1,427.1) 470,444 ccw(c448.27,422.27) 448.27,453 391,453 390.43,453.57 cw(c422.87,486) 377,486
  region net 3V3: 538,249 573.69,249 cw(c573.69,221.69) 593,241 593.71,240.29 ccw(c664.42,311) 664.42,211 689.58,211 ccw(c689.58,311) 760.29,240.29 781,261 cw(c800.31,241.69) 800.31,269 839.69,269 cw(c839.69,241.69) 859,261 cw(c851.76,253.76) 862,253.76 862,188 858.75,184.75 cw(c799,244.5) 799,160 796.8,160 ccw(c796.8,112.2) 763,146 cw(c748.52,160.48) 748.51,140 624.14,140 cw(c624.14,174.14) 600,150 558.78,191.22 cw(c577.56,210) 551,210 541.21,210 cw(c547.22,253.01) 519,220 cw(c550.88,228.47) 524.22,247.9
  region net NetC17_1: 682,689 739.59,689 cw(c739.59,685.59) 742,688 cw(c737.17,683.17) 744,683.17 744,672 cw(c736.76,679.24) 736.76,669 644.63,669 cw(c644.63,723.63) 606,685 585.29,705.71 ccw(c514.58,635) 514.58,735 411,735 cw(c411,773.63) 383.69,746.31 381,749 381,840.69 cw(c408.31,840.69) 389,860 458.86,860 cw(c458.86,825.86) 483,850 598.35,734.65 ccw(c623.59,759.89) 623.59,724.19 641.04,724.19 cw(c641.04,703.04) 656,718 662.34,711.66 cw(c648.69,698) 668,698
  region net 24V: 600,1255 755.49,1255 cw(c665.03,1212.45) 765,1212.44 765,1015.8 ccw(c857.18,1015.8) 792,950.62 792,844.8 cw(c744.21,844.79) 778,811 ccw(c797.3,791.69) 770,791.69 770,737.04 cw(c711.98,737.03) 753,696 683.06,696 cw(c750.19,759.18) 658,759.18 658,763 ccw(c600.07,763.01) 641.03,803.97 600,845

## Dimensions
2125.98,1377.95 to 2125.98,177.17 on Mechanical 1
-98.43,1377.95 to 2125.98,1377.95 on Mechanical 1